# Altium PCB mtk_pcb.PcbDoc
Units mm, origin at the board's own origin, x right, y up, seen from the top; angles counter-clockwise.
Board outline 48 x 83 mm, 2 copper layers (Top Layer, Bottom Layer); 42 components, 45 nets, 167 pads, 17 vias.
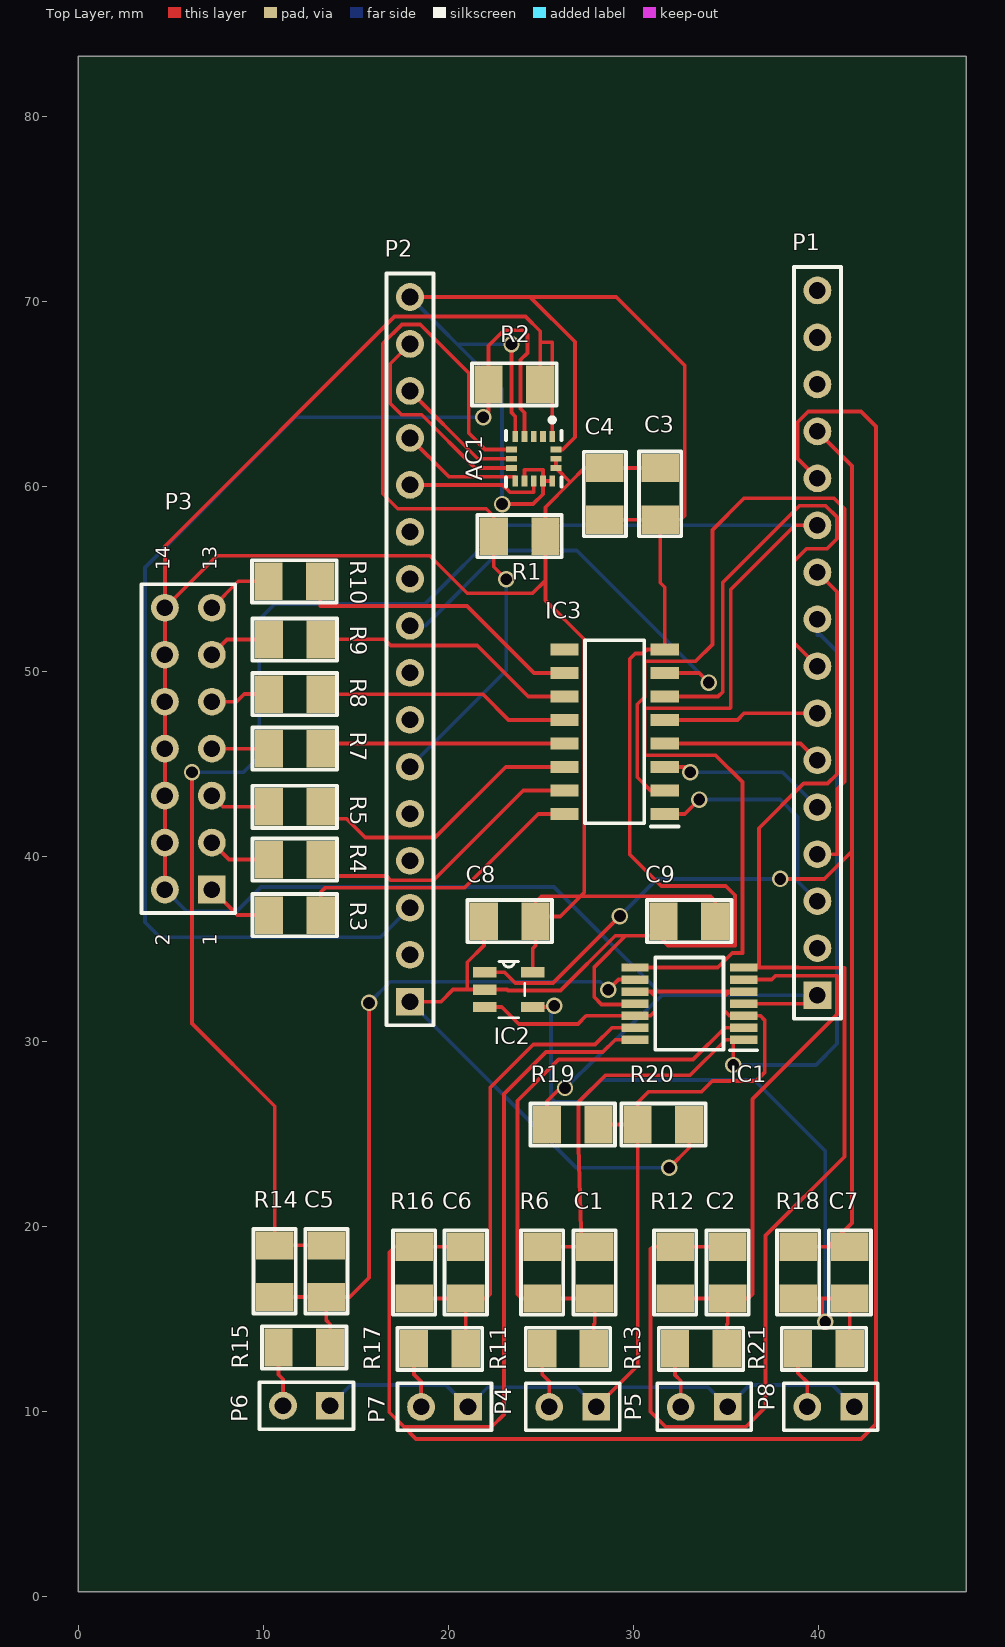
[diagram p0: Top Layer view]
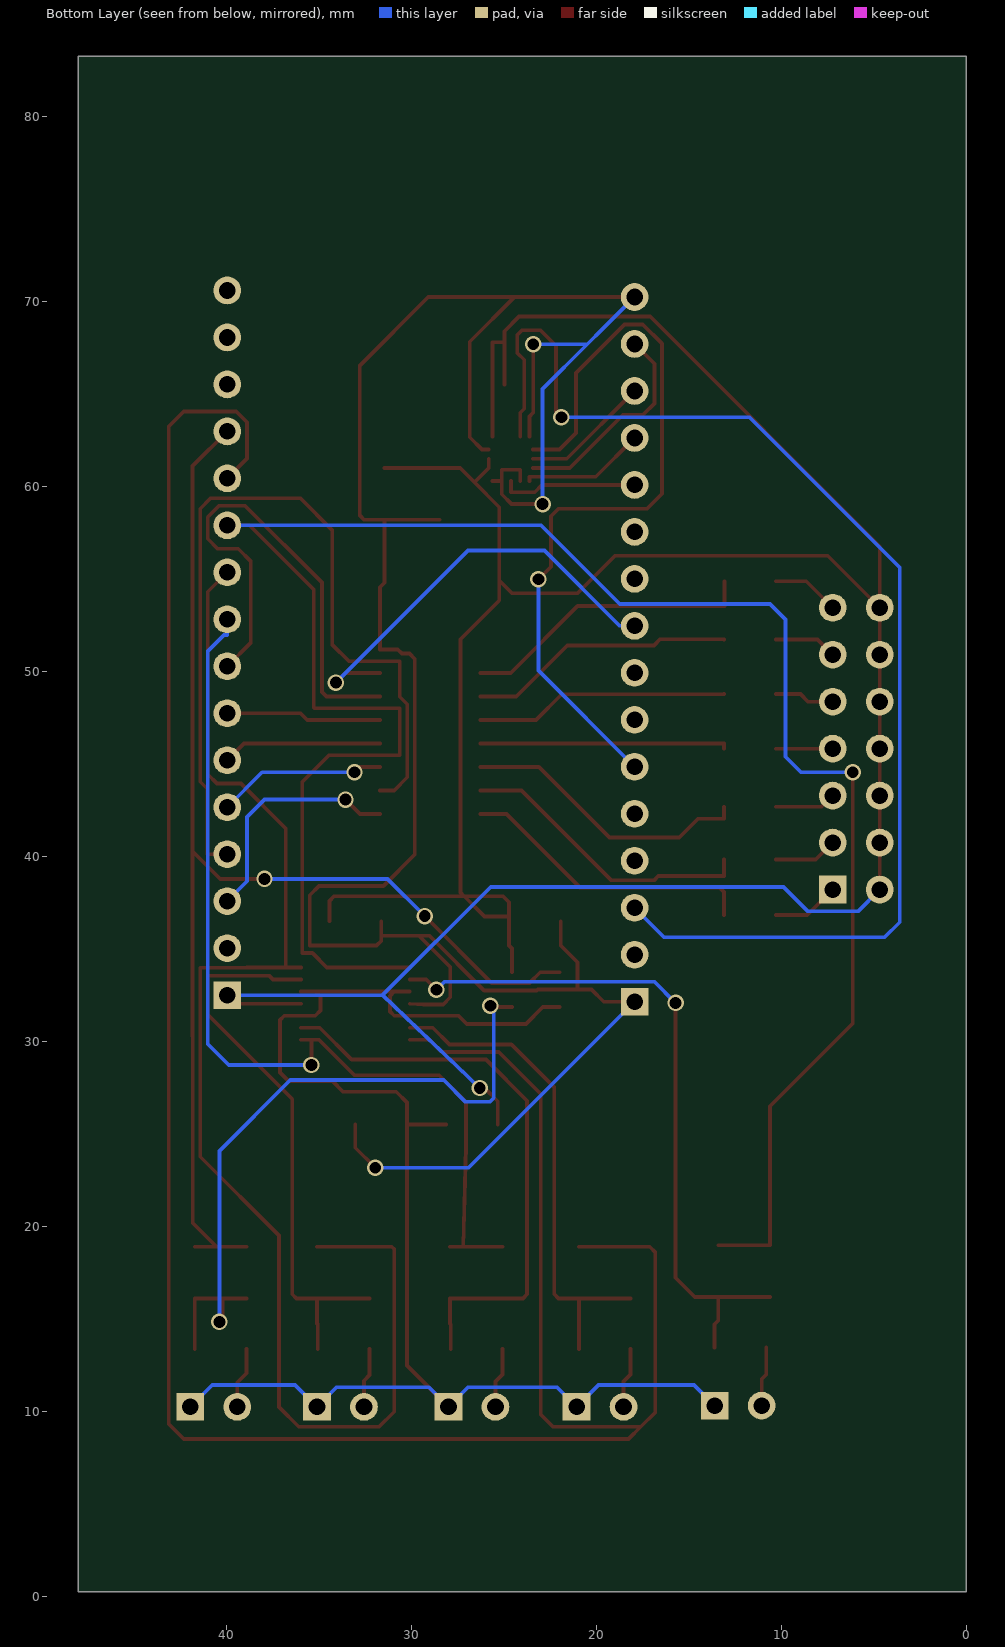
[diagram p1: Bottom Layer view, seen from below]
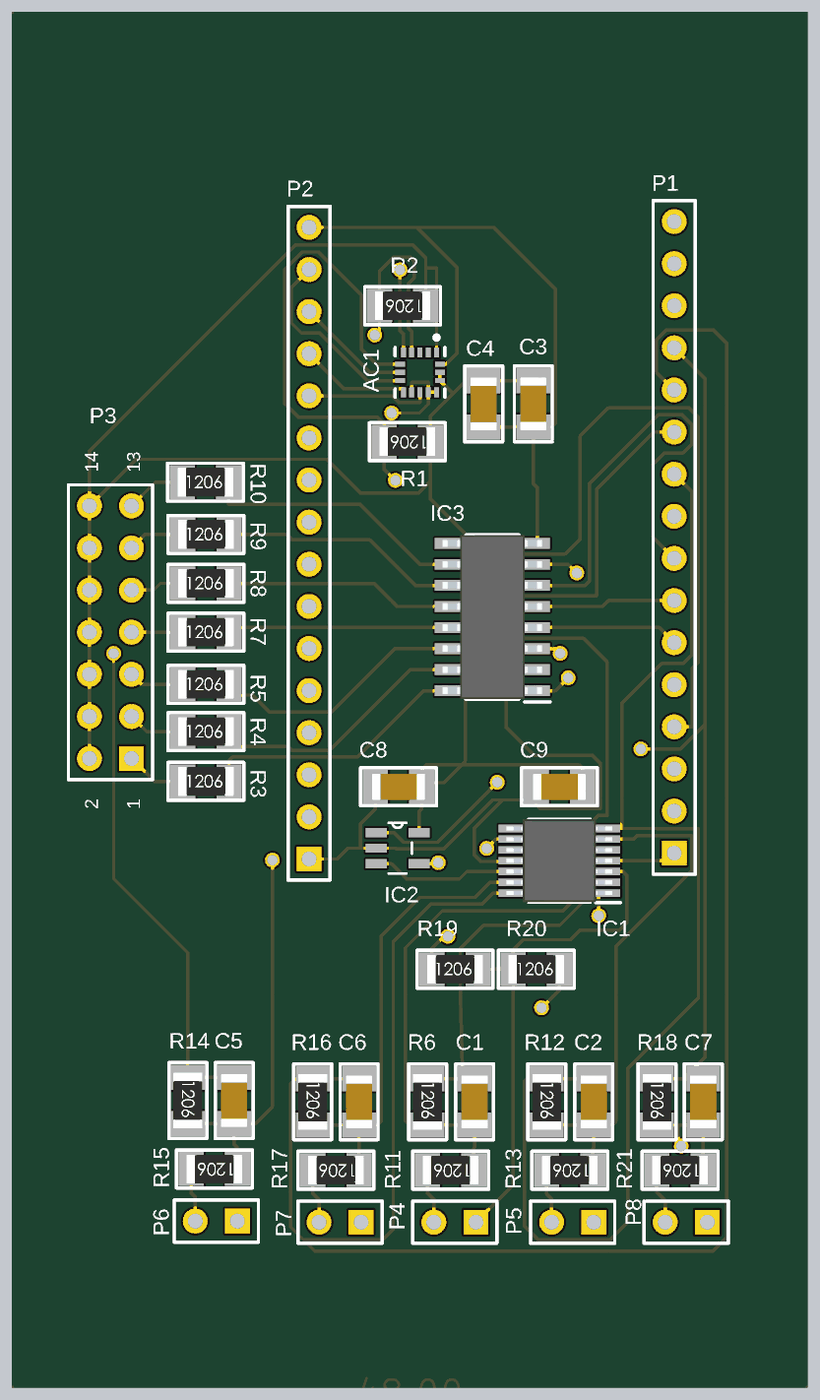
[diagram p2: 3D render of the assembled board from above, using the file's embedded part models]

## Layer stack, top to bottom
Top Solder: solder mask 0.0102, Solder Resist, Dk 3.5
Top Layer: signal copper 0.0356
Dielectric 1: dielectric 0.32, FR-4, Dk 4.8
Bottom Layer: signal copper 0.0356
Bottom Solder: solder mask 0.0102, Solder Resist, Dk 3.5

## Board outline
0,83.254 48,83.254 48,0.254 0,0.254

## Design rules (kind name [scope] priority, off if disabled: settings)
Clearance Clearance_Plane [InNetClass('All Nets') vs InNamedPolygon('Top_plane') + InNamedPolygon('Bottom_plane')] p1: gap=0.254 ignorepadtopadclearanceinfootprint=FALSE
Clearance Clearance_Board_Keepout [OnLayer('KeepOutLayer')] p2: gap=0.203 ignorepadtopadclearanceinfootprint=FALSE
Clearance Minimum_pad_component_clearcance [(InPadClass('All Pads') AND InComponentClass('All Components')) vs (InPadClass('All Pads') AND InComponentClass('All Components'))] p3: gap=0.178 ignorepadtopadclearanceinfootprint=FALSE
Clearance Clearance_DiffPairRouting [(IsTrack AND InDifferentialPairClass('All Differential Pairs')) vs (IsTrack AND InDifferentialPairClass('All Differential Pairs'))] p4: gap=0.203 ignorepadtopadclearanceinfootprint=FALSE
Clearance Clearance_Via_Pad [(IsVia) vs (IsPad)] p5: gap=0.254 ignorepadtopadclearanceinfootprint=FALSE
Clearance Clearance_Via_Via [(IsVia) vs (IsVia)] p6: gap=0.254 ignorepadtopadclearanceinfootprint=FALSE
Clearance Clearance_wara_Default [All] p7: gap=0.203 ignorepadtopadclearanceinfootprint=FALSE
ComponentClearance [All] p1: gap=0.203 collisioncheckmode=3 verticalgap=0.203 showdistances=FALSE
DiffPairsRouting [All] p1: maxlimit=0.254 minlimit=0.203 mostfreqgap=0.203 toplayer_minwidth=0.381 toplayer_maxwidth=0.381 toplayer_prefwidth=0.381 bottomlayer_minwidth=0.381 bottomlayer_maxwidth=0.381 bottomlayer_prefwidth=0.381 maxuncoupledlength=12.7
HoleSize [All] p1: absolutevalues=TRUE maxlimit=6.604 minlimit=0.508 maxpercent=80.000 minpercent=20.000
MinimumAnnularRing [All] p1: minimumring=0.203
MinimumSolderMaskSliver SilkscreenOverComponentPads [All] p2: minsoldermaskwidth=0.254
PlaneConnect [InNet('GND')] p1: planeconnectstyle=Relief reliefexpansion=0.508 reliefentries=4 reliefconductorwidth=0.254 reliefairgap=0.254
PolygonConnect [All] p1: connectstyle=Relief reliefconductorwidth=0.305 reliefentries=4 polygonreliefangle="90 Angle" airgapwidth=0.254
RoutingPriority RoutingPriority_Power [(InNet('VCC_GPS') AND InNet('VCC_GPS_ANT') AND InNet('VBAT') AND InNetClass('Power') AND InNetClass('signal'))] p1: routingpriority=100
RoutingPriority [All] p2 off: routingpriority=50
RoutingVias [All] p1: holewidth=0.635 width=0.889 viastyle="Through Hole" minholewidth=0.508 minwidth=0.762 maxholewidth=0.635 maxwidth=0.889
SolderMaskExpansion [All] p1: expansion=0.127
UnRoutedNet [All] p1: checkbadconnections=TRUE
Width Width_Diode [InNet('NetD4_1')] p1 off: maxlimit=1.27 minlimit=0.508 preferedwidth=0.508
Width Width_+24 [InNet('+24V_IN')] p2 off: maxlimit=1.27 minlimit=0.508 preferedwidth=0.508
Width Width_Power [InNet('VBAT')   + InNet('NetJ3_1')+ InNet('NetP3_2')] p3: maxlimit=0.762 minlimit=0.635 preferedwidth=0.635
Width Width_All [All] p4: maxlimit=0.635 minlimit=0.203 preferedwidth=0.203
24 further rules are at their usual default settings.

## Components (designator, comment, footprint, x,y, rotation, side; value= is the part's Value field where it differs from the comment)
AC1 "H3LIS331DLTR" PQFN50P300X300X100-16N 24.617,61.501 r270 top
C1 "0.033µF" SMD-1206C 27.911,17.501 r0 top value=0.033?F
C2 "0.033µF" SMD-1206C 35.101,17.501 r180 top value=0.033?F
C3 "100nF" SMD-1206C 31.455,59.604 r0 top value=0.10?F
C4 "10uF" SMD-1206C 28.459,59.598 r0 top value=0.10?F
C5 "0.033µF" SMD-1206C 13.405,17.576 r180 top value=0.033?F
C6 "0.033µF" SMD-1206C 20.941,17.501 r180 top value=0.033?F
C7 "0.033µF" SMD-1206C 41.705,17.501 r180 top value=0.033?F
C8 "0.01uF" SMD-1206C 23.323,36.501 r270 top value=0.10?F
C9 "0.01uF" SMD-1206C 33.029,36.501 r270 top value=0.10?F
IC1 "TLV2774AIPW" SOP65P640X120-14N 33.029,32.041 r180 top
IC2 "TLV2771CDBVR" SOT95P280X145-5N 23.266,32.801 r0 top
IC3 "ULN2003ADR2G" SOIC127P600X175-16N 28.987,46.744 r180 top
P1 "Header 16" HDR1X16 39.955,32.501 r90 top
P2 "Header 16" HDR1X16 17.927,32.147 r90 top
P3 "Header 7X2" HDR2X7 7.215,38.208 r90 top
P4 "Header 2" HDR1X2 27.992,10.24 r180 top
P5 "Header 2" HDR1X2 35.101,10.24 r180 top
P6 "Header 2" HDR1X2 13.6,10.307 r180 top
P7 "Header 2" HDR1X2 21.066,10.24 r180 top
P8 "Header 2" HDR1X2 41.951,10.24 r180 top
R1 "1k" SMD-1206-RES 23.852,57.318 r90 top
R2 "1k" SMD-1206-RES 23.57,65.521 r90 top
R3 "160" SMD-1206-RES 11.7,36.828 r270 top
R4 "160" SMD-1206-RES 11.7,39.828 r270 top
R5 "160" SMD-1206-RES 11.7,42.685 r270 top
R6 "1M" SMD-1206-RES 25.073,17.501 r180 top
R7 "160" SMD-1206-RES 11.7,45.828 r270 top
R8 "160" SMD-1206-RES 11.7,48.778 r270 top
R9 "160" SMD-1206-RES 11.7,51.728 r270 top
R10 "160" SMD-1206-RES 11.675,54.877 r270 top
R11 "100k" SMD-1206-RES 26.47,13.375 r90 top
R12 "1M" SMD-1206-RES 32.261,17.501 r180 top
R13 "100k" SMD-1206-RES 33.658,13.375 r90 top
R14 "1M" SMD-1206-RES 10.611,17.576 r180 top
R15 "100k" SMD-1206-RES 12.214,13.45 r90 top
R16 "1M" SMD-1206-RES 18.147,17.501 r180 top
R17 "100k" SMD-1206-RES 19.544,13.375 r90 top
R18 "1M" SMD-1206-RES 38.911,17.501 r180 top
R19 "100k" SMD-1206-RES 26.729,25.501 r270 top
R20 "100k" SMD-1206-RES 31.632,25.501 r270 top
R21 "100k" SMD-1206-RES 40.308,13.375 r90 top

## Footprints (in the part's own frame and the unit in brackets; to place one, negate y for a bottom-side part, rotate by r counter-clockwise, add the part's x,y. Pads: shape width x height; smd on the part's side, far side on the other; paste and mask are expansions set on the pad)
HDR1X2 [mm] "Connector; Header; 2 Position"
  rect 1.5x1.5 hole 0.9: 1(0,0)
  round 1.5 hole 0.9: 2(2.54,0)
  silkscreen extent -1.27,-1.27 3.81,1.27
HDR1X16 [mm] "Connector; Header; 16 Position"
  rect 1.5x1.5 hole 0.9: 1(0,0)
  round 1.5 hole 0.9: 2(2.54,0) 3(5.08,0) 4(7.62,0) 5(10.16,0) 6(12.7,0) 7(15.24,0) 8(17.78,0) 9(20.32,0) 10(22.86,0) 11(25.4,0) 12(27.94,0) 13(30.48,0) 14(33.02,0) 15(35.56,0) 16(38.1,0)
  silkscreen extent -1.27,-1.27 39.37,1.27
HDR2X7 [mm] "Connector; Header; 7x2 Position"
  rect 1.5x1.5 hole 0.9: 1(0,0)
  round 1.5 hole 0.9: 2(0,2.54) 3(2.54,0) 4(2.54,2.54) 5(5.08,0) 6(5.08,2.54) 7(7.62,0) 8(7.62,2.54) 9(10.16,0) 10(10.16,2.54) 11(12.7,0) 12(12.7,2.54) 13(15.24,0) 14(15.24,2.54)
  silkscreen extent -1.27,-1.27 16.51,3.81
PQFN50P300X300X100-16N [mm]
  rect 0.6x0.3 smd: 1(-1.2,1) 2(-1.2,0.5) 3(-1.2,0) 4(-1.2,-0.5) 5(-1.2,-1) 9(1.2,-1) 10(1.2,-0.5) 11(1.2,0) 12(1.2,0.5) 13(1.2,1)
  rect 0.3x0.6 smd: 6(-0.5,-1.2) 7(0,-1.2) 8(0.5,-1.2) 14(0.5,1.2) 15(0,1.2) 16(-0.5,1.2)
  silkscreen extent -2.22,-1.5 1.5,1.5
SMD-1206-RES [mil]
  rect 80x60 smd: 1(0,55) 2(0,-55)
  silkscreen extent -45,-90 45,90, body extent -34,-66 34,66, height 33
SMD-1206C [mil]
  rect 80x60 smd: 1(0,55) 2(0,-55)
  silkscreen extent -45,-90 45,90, body extent -31,-63 32,63, height 39
SOIC127P600X175-16N [mm]
  rect 1.525x0.65 smd: 1(-2.712,4.445) 2(-2.712,3.175) 3(-2.712,1.905) 4(-2.712,0.635) 5(-2.712,-0.635) 6(-2.712,-1.905) 7(-2.712,-3.175) 8(-2.712,-4.445) 9(2.712,-4.445) 10(2.712,-3.175) 11(2.712,-1.905) 12(2.712,-0.635) 13(2.712,0.635) 14(2.712,1.905) 15(2.712,3.175) 16(2.712,4.445)
  silkscreen extent -3.47,-4.95 1.6,5.12, body extent -3,-4.95 3,4.95, height 1.75
SOP65P640X120-14N [mm]
  rect 1.475x0.45 smd: 1(-2.938,1.95) 2(-2.938,1.3) 3(-2.938,0.65) 4(-2.938,0) 5(-2.938,-0.65) 6(-2.938,-1.3) 7(-2.938,-1.95) 8(2.938,-1.95) 9(2.938,-1.3) 10(2.938,-0.65) 11(2.938,0) 12(2.938,0.65) 13(2.938,1.3) 14(2.938,1.95)
  silkscreen extent -3.67,-2.5 1.85,2.52, body extent -3.2,-2.5 3.2,2.5, height 1.2
SOT95P280X145-5N [mil]
  rect 50x22 smd: 1(-51,37) 2(-51,0) 3(-51,-37) 4(51,-37) 5(51,37)
  silkscreen extent -21,-60 34,60

## Part data
AC1: "Accelerometer", Manufacturer_Name=STMicroelectronics, Mouser Part Number=511-H3LIS331DLTR, RS Part Number=1106549P, Datasheet Link=http://www.st.com/st-web-ui/static/active/en/resource/technical/document/datasheet/DM00053090.pdf, Height=1mm, Manufacturer_Part_Number=H3LIS331DLTR, Mouser Price/Stock=https://www.mouser.com/Search/Refine.aspx?Keyword=511-H3LIS331DLTR, RS Price/Stock=http://uk.rs-online.com/web/p/products/1106549P
C1 C2 C5 C6 C7: library part GC331AD72E333KX01D, "CAP CER 0.033UF 250V X7T 1206", Digi-Key Part Number=490-13989-1-ND, Manufacturer="Murata Electronics North America", Operating Temperature="-55?C ~ 125?C", Package / Case="1206 (3216 Metric)", Ratings=AEC-Q200, Temperature Coefficient=X7T, Tolerance=?10%, Voltage=250V, @ qty=0, Applications=Automotive, Datasheets=http://search.murata.co.jp/Ceramy/image/img/A01X/G101/ENG/GC331AD72E333KX01-01.pdf, Factory Stock=0, Features=-, Height - Seated (Max)=-, Image=//media.digikey.com/Renders/Murata%20Renders/1206(GC3)320x160.jpg, Lead Spacing=-, Lead Style=-, Minimum Quantity=1, Mounting Type="Surface Mount, MLCC", Packaging="Cut Tape (CT)", Part Number=GC331AD72E333KX01D, Part Status=Active, Quantity Available=3999, Series=GC3, Size / Dimension="0.126\" L x 0.063\" W (3.20mm x 1.60mm)", Thickness (Max)="0.039\" (1.00mm)", Unit Price (USD)=0.33
C3 C4 C8 C9: library part LLM315R71C104MA11L, "CAP CER 0.1UF 16V X7R 1206", Digi-Key Part Number=490-4495-1-ND, Manufacturer="Murata Electronics North America", Operating Temperature="-55?C ~ 125?C", Package / Case="1206 (3216 Metric)", Ratings=-, Temperature Coefficient=X7R, Tolerance=?20%, Voltage=16V, @ qty=0, Applications="Bypass, Decoupling", Datasheets=http://www.murata.com/~/media/webrenewal/support/library/catalog/products/capacitor/mlcc/c02e.pdf, Factory Stock=0, Features="Low ESL (Multi-Terminal)", Height - Seated (Max)=-, Image=//media.digikey.com/Renders/Murata%20Renders/1206(LLM315).jpg, Lead Spacing=-, Lead Style=-, Minimum Quantity=1, Mounting Type="Surface Mount, MLCC", Packaging="Cut Tape (CT)", Part Number=LLM315R71C104MA11L, Part Status=Active, Quantity Available=2915, Series=LLM, Size / Dimension="0.126\" L x 0.063\" W (3.20mm x 1.60mm)", Thickness (Max)="0.022\" (0.55mm)", Unit Price (USD)=0.9
IC1: "Integrated Circuit", Manufacturer_Name="Texas Instruments", RS Part Number=4625114, Datasheet Link=http://www.ti.com/lit/ds/symlink/tlv2774a.pdf, Height=1.2mm, Manufacturer_Part_Number=TLV2774AIPW, RS Price/Stock=https://uk.rs-online.com/web/p/products/4625114
IC2: "Integrated Circuit", Manufacturer_Name="Texas Instruments", Mouser Part Number=595-TLV2771CDBVR, Datasheet Link=http://www.ti.com/lit/gpn/tlv2771, Manufacturer_Part_Number=TLV2771CDBVR, Mouser Price/Stock=https://www.mouser.com/Search/Refine.aspx?Keyword=595-TLV2771CDBVR
IC3: "Integrated Circuit", Manufacturer_Name="ON Semiconductor", Mouser Part Number=863-ULN2003ADR2G, RS Part Number=1868994, Datasheet Link=http://www.onsemi.com/pub/Collateral/ULN2003A-D.PDF, Height=1.75mm, Manufacturer_Part_Number=ULN2003ADR2G, Mouser Price/Stock=https://www.mouser.com/Search/Refine.aspx?Keyword=863-ULN2003ADR2G, RS Price/Stock=http://uk.rs-online.com/web/p/products/1868994
P1 P2: "Header, 16-Pin", LatestRevisionDate=17-Jul-2002, LatestRevisionNote="Re-released for DXP Platform.", Publisher="Altium Limited"
P3: "Header, 7-Pin, Dual row", LatestRevisionDate=17-Jul-2002, LatestRevisionNote="Re-released for DXP Platform.", Publisher="Altium Limited"
P4 P5 P6 P7 P8: "Header, 2-Pin", LatestRevisionDate=17-Jul-2002, LatestRevisionNote="Re-released for DXP Platform.", Publisher="Altium Limited"
R1 R2: library part ERJ-8ENF1001V, "RES SMD 1K OHM 1% 1/4W 1206", Digi-Key Part Number=P1.00KFCT-ND, Manufacturer="Panasonic Electronic Components", Operating Temperature="-55?C ~ 155?C", Package / Case="1206 (3216 Metric)", Power (Watts)="0.25W, 1/4W", Supplier Device Package=1206, Temperature Coefficient=?100ppm/?C, Tolerance=?1%, @ qty=1500, Composition="Thick Film", Datasheets=http://industrial.panasonic.com/www-cgi/jvcr13pz.cgi?E+PZ+3+AOA0002+ERJ8ENF1001V+7+WW, Factory Stock=0, Failure Rate=-, Features="Automotive AEC-Q200", Height - Seated (Max)="0.028\" (0.70mm)", Image=//media.digikey.com/Renders/Panasonic%20Renders/ERJ-1206%20Pkg.jpg, Minimum Quantity=1, Number of Terminations=2, Packaging="Cut Tape (CT)", Part Number=ERJ-8ENF1001V, Part Status=Active, Quantity Available=607104, Series=ERJ, Size / Dimension="0.126\" L x 0.063\" W (3.20mm x 1.60mm)", Unit Price (USD)=0.00933
R3 R4 R5 R7 R8 R9 R10: library part ERJ-8ENF1600V, "RES SMD 160 OHM 1% 1/4W 1206", Digi-Key Part Number=P160FCT-ND, Manufacturer="Panasonic Electronic Components", Operating Temperature="-55?C ~ 155?C", Package / Case="1206 (3216 Metric)", Power (Watts)="0.25W, 1/4W", Supplier Device Package=1206, Temperature Coefficient=?100ppm/?C, Tolerance=?1%, @ qty=1500, Composition="Thick Film", Datasheets=http://industrial.panasonic.com/www-cgi/jvcr13pz.cgi?E+PZ+3+AOA0002+ERJ8ENF1600V+7+WW, Factory Stock=0, Failure Rate=-, Features="Automotive AEC-Q200", Height - Seated (Max)="0.028\" (0.70mm)", Image=//media.digikey.com/Renders/Panasonic%20Renders/ERJ-1206%20Pkg.jpg, Minimum Quantity=1, Number of Terminations=2, Packaging="Cut Tape (CT)", Part Number=ERJ-8ENF1600V, Part Status=Active, Quantity Available=54151, Series=ERJ, Size / Dimension="0.126\" L x 0.063\" W (3.20mm x 1.60mm)", Unit Price (USD)=0.00933
R6 R12 R14 R16 R18: library part ERJ-8ENF1004V, "RES SMD 1M OHM 1% 1/4W 1206", Digi-Key Part Number=P1.00MFCT-ND, Manufacturer="Panasonic Electronic Components", Operating Temperature="-55?C ~ 155?C", Package / Case="1206 (3216 Metric)", Power (Watts)="0.25W, 1/4W", Supplier Device Package=1206, Temperature Coefficient=?100ppm/?C, Tolerance=?1%, @ qty=1500, Composition="Thick Film", Datasheets=http://industrial.panasonic.com/www-cgi/jvcr13pz.cgi?E+PZ+3+AOA0002+ERJ8ENF1004V+7+WW, Factory Stock=0, Failure Rate=-, Features="Automotive AEC-Q200", Height - Seated (Max)="0.028\" (0.70mm)", Image=//media.digikey.com/Renders/Panasonic%20Renders/ERJ-1206%20Pkg.jpg, Minimum Quantity=1, Number of Terminations=2, Packaging="Cut Tape (CT)", Part Number=ERJ-8ENF1004V, Part Status=Active, Quantity Available=390460, Series=ERJ, Size / Dimension="0.126\" L x 0.063\" W (3.20mm x 1.60mm)", Unit Price (USD)=0.00933
R11 R13 R15 R17 R19 R20 R21: library part ERJ-8ENF1003V, "RES SMD 100K OHM 1% 1/4W 1206", Digi-Key Part Number=P100KFCT-ND, Manufacturer="Panasonic Electronic Components", Operating Temperature="-55?C ~ 155?C", Package / Case="1206 (3216 Metric)", Power (Watts)="0.25W, 1/4W", Supplier Device Package=1206, Temperature Coefficient=?100ppm/?C, Tolerance=?1%, @ qty=1500, Composition="Thick Film", Datasheets=http://industrial.panasonic.com/www-cgi/jvcr13pz.cgi?E+PZ+3+AOA0002+ERJ8ENF1003V+7+WW, Factory Stock=0, Failure Rate=-, Features="Automotive AEC-Q200", Height - Seated (Max)="0.028\" (0.70mm)", Image=//media.digikey.com/Renders/Panasonic%20Renders/ERJ-1206%20Pkg.jpg, Minimum Quantity=1, Number of Terminations=2, Packaging="Cut Tape (CT)", Part Number=ERJ-8ENF1003V, Part Status=Active, Quantity Available=576605, Series=ERJ, Size / Dimension="0.126\" L x 0.063\" W (3.20mm x 1.60mm)", Unit Price (USD)=0.00933

## Via types
v1: diameter 0.889, hole 0.635, Top Layer to Bottom Layer, 17 vias

## Nets (pads, with @x,y where several pads share a name; then routed paths per layer and width w, separated by ;. In a path a pad name is that pad's centre, name@x,y a point inside that pad or via, vN(x,y) a via of type N, cw(c..) or ccw(c..) an arc to the next point about the centre after c; other vN are vias at no path point)
1IN+: IC1.3 IC1.5 IC1.10 IC1.12 IC2.3 P4.1 P5.1 P6.1 P7.1 P8.1 R19.1 R20.2 | length 82.3
  Top Layer w0.203: IC2.3 22.891,31.861 23.805,30.948 27.006,30.948 27.45,31.391 IC1.12 30.93,31.391 31.158,31.62 31.158,32.463 30.93,32.691 ; P4.1 30.235,12.484 R20.2 ; R19.1 R20.2 ; IC1.10 30.93,32.691 ; IC1.5 35.197,32.691 ; R20.2 30.235,26.693 30.82,27.277 33.693,27.277 34.27,27.855 36.638,27.855 37.102,28.319 37.102,31.164 36.874,31.391 IC1.3 35.197,31.391 34.917,31.671 34.917,32.412 35.197,32.691 ; 30.93,32.691 35.197,32.691
  Bottom Layer w0.203: P6.1 14.721,11.428 19.879,11.428 P7.1 22.127,11.301 26.932,11.301 P4.1 29.053,11.301 34.04,11.301 P5.1 36.288,11.428 40.763,11.428 P8.1
1IN-: C1.2 IC1.2 R6.1 R11.2 | length 31.3
  Top Layer w0.203: R11.2 27.867,14.704 27.911,14.749 C1.2 R6.1 23.967,16.104 23.741,16.33 23.741,26.795 25.964,29.017 33.228,29.017 34.952,30.741 IC1.2
2IN-: C2.1 IC1.6 R12.1 R13.2 | length 31.3
  Top Layer w0.203: R12.1 C2.1 ; R13.2 35.055,14.704 35.101,14.75 C2.1 ; IC1.6 37.483,33.341 37.698,33.556 41.01,33.556 41.01,31.446 36.441,26.878 36.441,16.33 36.215,16.104 C2.1
3IN-: C5.1 IC1.9 R14.1 R15.2 | length 38.5
  Top Layer w0.203: R14.1 C5.1 ; R15.2 13.611,14.704 13.405,14.911 C5.1 ; v1(15.715,32.078) 15.715,17.221 14.674,16.179 C5.1 ; v1(28.644,32.789) 29.196,33.341 IC1.9
  Bottom Layer w0.203: v1(15.715,32.078) 16.858,33.221 28.212,33.221 v1(28.644,32.789)
3V3: AC1.1 AC1.14 AC1.15 C3.1 C4.1 C8.1 C9.1 IC1.4 IC2.5 P1.1 P3.2 P3.4 P3.6 P3.8 P3.10 P3.12 P3.14 R1.2 R2.2 R19.2 | length 177.2
  Top Layer w0.203: P3.2 P3.4 P3.6 P3.8 P3.10 P3.12 P3.14 ; IC2.5 24.562,35.024 24.72,35.182 C8.1 C8.1@24.72,36.752 ; R2.2 24.967,67.795 ; R19.2 25.332,26.76 26.053,27.481 v1(26.307,27.481) ; AC1.1 25.617,67.795 24.967,67.795 ; AC1.15 AC1.14 26.591,60.226 ; C3.1 29.945,61.001 29.939,60.995 C4.1 27.36,60.995 26.591,60.226 ; C9.1 34.426,37.598 34.181,37.844 27.145,37.844 ; IC1.4 39.307,32.041 39.307,32.501 P1.1 ; P3.14 4.675,56.776 17.087,69.187 24.173,69.187 24.967,68.394 24.967,67.795 ; P3.14 7.485,56.259 18.992,56.259 21.024,54.227 24.554,54.227 25.249,54.922 ; C8.1@24.72,36.752 26.053,36.752 27.145,37.844 ; C8.1@24.72,36.752 24.72,37.527 25.037,37.844 27.145,37.844 ; 25.249,54.922 R1.2 25.249,58.884 26.591,60.226 ; 25.249,54.922 25.249,53.846 27.348,51.747 27.348,38.047 27.145,37.844
  Bottom Layer w0.203: P3.2 5.852,37.031 8.552,37.031 9.873,38.352 25.711,38.352 31.562,32.501 ; v1(26.307,27.481) 31.562,32.501 ; P1.1 31.562,32.501
4IN-: C6.1 IC1.13 R16.1 R17.2 | length 27.3
  Top Layer w0.203: R16.1 C6.1 ; R17.2 C6.1 ; IC1.13 28.847,30.741 27.936,29.83 24.592,29.83 22.268,27.506 22.268,16.33 22.042,16.104 C6.1
5IN-: C7.1 IC2.4 R18.1 R21.2 | length 39.4
  Top Layer w0.203: IC2.4 25.658,31.861 v1(25.723,31.926) ; R18.1 40.201,16.104 ; v1(40.378,14.831) 40.201,15.009 40.201,16.104 ; R21.2 C7.1 40.201,16.104
  Bottom Layer w0.203: v1(25.723,31.926) 25.545,31.748 25.545,26.947 25.761,26.731 27.069,26.731 28.25,27.912 36.543,27.912 40.378,24.077 v1(40.378,14.831)
A1/IO26: C1.1 IC1.1 P1.9 R6.2 | length 51.9
  Top Layer w0.203: R6.2 C1.1@27.196,18.898 ; C1.1 C1.1@27.196,18.898 ; v1(35.4,28.725) IC1.1@35.4,30.091 ; IC1.1 IC1.1@35.4,30.091 ; C1.1@27.196,18.898 27.043,24.331 27.043,26.719 28.491,28.166 33.069,28.166 34.994,30.091 IC1.1@35.4,30.091
  Bottom Layer w0.203: v1(35.4,28.725) 39.87,28.725 41.013,29.868 41.013,51.077 40.124,51.966 39.955,51.966 P1.9
A2/IO27: C2.2 IC1.7 P1.10 R12.2 | length 75.3
  Top Layer w0.203: C2.2 R12.2 31.057,18.898 30.93,18.771 30.93,9.98 31.742,9.167 36.086,9.167 37.153,10.234 37.153,19.505 41.416,23.769 41.416,33.983 38.913,33.983 38.905,33.991 36.797,33.991 ; IC1.7 36.797,33.991 ; P1.10 41.01,54.306 41.01,44.444 40.505,43.94 39.21,43.94 36.797,41.527 36.797,33.991
A3/IO14: C5.2 IC1.8 P1.11 R14.2 | length 114.9
  Top Layer w0.203: v1(6.139,44.549) 6.139,30.96 10.61,26.49 10.61,18.973 R14.2 C5.2 ; IC1.8 34.57,33.991 35.353,34.774 35.9,34.774 35.9,44.024 34.45,45.474 30.625,45.474 30.625,48.009 35.241,48.009 35.273,48.041 35.273,54.43 38.744,57.901 P1.11
  Bottom Layer w0.203: v1(6.139,44.549) 8.933,44.549 9.771,45.388 9.771,52.804 10.61,53.643 18.738,53.643 22.996,57.901 P1.11
A4/IO12: C6.2 IC1.14 P1.12 R16.2 | length 133.7
  Top Layer w0.203: C6.2 R16.2 17.112,18.898 16.807,18.593 16.807,9.955 17.595,9.167 ; IC1.14 29.019,30.091 28.351,29.424 25.278,29.424 23.005,27.15 23.005,9.828 22.344,9.167 17.595,9.167 ; P1.12 38.88,61.516 38.88,63.472 39.464,64.057 42.309,64.057 43.122,63.244 43.122,9.32 42.309,8.507 18.255,8.507 17.595,9.167
A5/IO13: C7.2 IC2.1 P1.13 R18.2 | length 71.2
  Top Layer w0.203: IC2.1 23.03,33.741 23.614,33.157 25.658,33.157 v1(29.279,36.777) ; v1(37.94,38.784) 40.328,38.784 41.826,40.282 ; R18.2 40.533,18.898 ; P1.13 41.826,61.11 41.826,40.282 ; C7.2 40.533,18.898 ; 40.533,18.898 41.823,20.187 41.826,40.282
  Bottom Layer w0.203: v1(29.279,36.777) 31.285,38.784 v1(37.94,38.784)
GND: AC1.5 AC1.10 AC1.12 AC1.13 AC1.16 C3.2 C4.2 C8.2 C9.2 IC1.11 IC2.2 IC3.8 P2.1 P2.16 R20.1 | length 146.3
  Top Layer w0.203: P2.1 19.601,32.147 20.255,32.801 21.024,32.801 ; P2.16 24.423,70.247 ; C8.2 21.926,35.177 21.024,34.275 21.024,32.801 ; v1(22.903,59.053) 24.583,59.053 25.117,59.586 AC1.12 ; v1(23.414,67.689) 23.414,63.997 23.617,63.794 AC1.5 ; AC1.10 24.117,60.907 25.117,60.907 AC1.12 ; AC1.13 AC1.12 ; AC1.16 26.188,62.001 26.846,62.66 26.846,67.823 24.423,70.247 ; C4.2 29.939,58.201 29.945,58.207 C3.2 ; IC1.11 29.35,31.998 28.279,31.998 27.894,32.383 27.894,34.021 29.583,35.71 ; C9.2 C9.2@31.632,35.71 ; v1(31.95,23.175) 33.029,24.255 R20.1 ; 21.024,32.801 IC2.2 23.165,32.801 23.216,32.75 26.065,32.75 29.025,35.71 29.583,35.71 ; 24.423,70.247 29.082,70.247 32.784,66.546 32.784,58.436 32.555,58.207 C3.2 ; 29.583,35.71 C9.2@31.632,35.71 ; C3.2 31.455,54.801 31.699,54.557 IC3.8 30.737,51.189 30.513,50.965 30.107,50.965 29.812,50.671 29.812,40.104 31.514,38.403 34.994,38.403 35.493,37.903 35.493,35.18 31.883,35.18 31.632,35.431 C9.2@31.632,35.71
  Bottom Layer w0.203: P2.1 26.899,23.175 v1(31.95,23.175) ; P2.16 19.637,68.537 20.486,67.689 ; v1(22.903,59.053) 22.903,65.271 20.486,67.689 ; v1(23.414,67.689) 20.486,67.689
IO0/INT2: AC1.9 P2.13 | length 6.8
  Top Layer w0.203: P2.13 20.028,60.526 23.617,60.526 AC1.9
IO2/SA0: AC1.7 P2.14 | length 7
  Top Layer w0.203: P2.14 21.593,61.501 AC1.7
IO4/INT1: AC1.11 P2.12 | length 7.5
  Top Layer w0.203: P2.12 22.929,60.087 23.328,59.688 24.617,59.688 AC1.11
IO5/LED7: IC3.7 P2.9 | length 23.4
  Top Layer w0.203: IC3.7 33.561,49.919 v1(34.079,49.401)
  Bottom Layer w0.203: P2.9 18.73,52.467 22.802,56.538 26.942,56.538 v1(34.079,49.401)
IO15/CS: AC1.8 P2.15 | length 11.7
  Top Layer w0.203: P2.15 16.858,66.638 16.858,64.488 17.468,63.879 18.56,63.879 21.438,61.001 AC1.8
IO21/SDA: AC1.6 P2.6 R1.1 | length 42.7
  Top Layer w0.203: v1(23.132,54.989) 22.455,55.666 R1.1 22.455,58.392 22.049,58.799 17.264,58.799 16.452,59.612 16.452,67.725 17.488,68.762 18.477,68.762 21.1,66.139 21.1,62.888 21.987,62.001 AC1.6
  Bottom Layer w0.203: P2.6 23.132,50.052 v1(23.132,54.989)
IO22/SCL: AC1.4 P2.3 R2.1 | length 68.4
  Top Layer w0.203: v1(21.887,63.752) 22.173,64.038 R2.1 22.173,67.613 23.011,68.451 24.021,68.451 24.275,68.197 24.275,67.225 23.9,66.851 23.9,64.209 24.117,63.992 AC1.4
  Bottom Layer w0.203: P2.3 16.334,35.634 4.412,35.634 3.599,36.447 3.599,55.624 11.727,63.752 v1(21.887,63.752)
IO25/LED6: IC3.6 P1.8 | length 27.5
  Top Layer w0.203: IC3.6 34.587,48.649 34.834,48.897 34.834,54.804 38.986,58.956 40.399,58.956 41.01,58.345 41.01,57.173 40.476,56.64 39.362,56.64 38.677,55.954 38.677,51.56 P1.8
IO32/LED4: IC3.4 P1.6 | length 8.6
  Top Layer w0.203: IC3.4 39.047,46.109 P1.6
IO33/LED5: IC3.5 P1.7 | length 8.4
  Top Layer w0.203: IC3.5 35.629,47.379 35.99,47.741 P1.7
IO34/LED3: IC3.3 P1.5 | length 9.2
  Top Layer w0.203: IC3.3 32.784,44.839 v1(33.074,44.549)
  Bottom Layer w0.203: v1(33.074,44.549) 38.067,44.549 P1.5
IO36/LED1: IC3.1 P1.3 | length 12.9
  Top Layer w0.203: IC3.1 32.784,42.299 v1(33.561,43.076)
  Bottom Layer w0.203: v1(33.561,43.076) 37.94,43.076 38.88,42.136 38.88,38.656 P1.3
IO39/LED2: IC3.2 P1.4 | length 46.4
  Top Layer w0.203: IC3.2 30.93,43.569 30.218,44.28 30.218,48.232 30.625,48.639 30.625,50.549 33.368,50.549 34.282,51.463 34.282,57.656 35.989,59.362 40.853,59.362 41.416,58.799 41.416,44.041 41.039,43.664 41.039,40.121 P1.4
NetIC3_10: IC3.10 R10.1 | length 16
  Top Layer w0.203: R10.1 13.072,53.541 21.009,53.541 24.63,49.919 IC3.10
NetIC3_11: IC3.11 R9.1 | length 14.5
  Top Layer w0.203: R9.1 13.097,51.738 16.553,51.738 16.883,51.407 21.567,51.407 24.326,48.649 IC3.11
NetIC3_12: IC3.12 R8.1 | length 13.8
  Top Layer w0.203: R8.1 13.097,48.766 21.872,48.766 23.259,47.379 IC3.12
NetIC3_13: IC3.13 R7.1 | length 13.5
  Top Layer w0.203: R7.1 13.097,46.109 IC3.13
NetIC3_14: IC3.14 R5.1 | length 15.8
  Top Layer w0.203: R5.1 13.097,42.035 14.496,42.035 15.512,41.019 19.286,41.019 23.106,44.839 IC3.14
NetIC3_15: IC3.15 R4.1 | length 16.2
  Top Layer w0.203: R4.1 13.097,38.936 16.655,38.936 16.883,38.707 19.184,38.707 24.046,43.569 IC3.15
NetIC3_16: IC3.16 R3.1 | length 16.2
  Top Layer w0.203: R3.1 13.097,38.072 13.326,38.301 20.861,38.301 24.859,42.299 IC3.16
NetP3_1: P3.1 R3.2 | length 3.7
  Top Layer w0.203: P3.1 8.595,36.828 R3.2
NetP3_3: P3.3 R4.2 | length 3.5
  Top Layer w0.203: P3.3 8.135,39.828 R4.2
NetP3_5: P3.5 R5.2 | length 3.3
  Top Layer w0.203: P3.5 7.818,42.685 R5.2
NetP3_7: P3.7 R7.2 | length 3.1
  Top Layer w0.203: P3.7 R7.2
NetP3_9: P3.9 R8.2 | length 3.3
  Top Layer w0.203: P3.9 8.552,48.368 8.962,48.778 R8.2
NetP3_11: P3.11 R9.2 | length 3.4
  Top Layer w0.203: P3.11 8.035,51.728 R9.2
NetP3_13: P3.13 R10.2 | length 3.7
  Top Layer w0.203: P3.13 8.644,54.877 R10.2
NetP4_2: P4.2 R11.1 | length 3.3
  Top Layer w0.203: R11.1 25.073,11.985 25.452,11.606 P4.2
NetP5_2: P5.2 R13.1 | length 3.3
  Top Layer w0.203: R13.1 32.261,11.956 32.561,11.656 P5.2
NetP6_2: P6.2 R15.1 | length 3.2
  Top Layer w0.203: R15.1 10.817,11.976 11.06,11.733 P6.2
NetP7_2: P7.2 R17.1 | length 3.3
  Top Layer w0.203: R17.1 18.147,11.985 18.526,11.606 P7.2
NetP8_2: P8.2 R21.1 | length 3.3
  Top Layer w0.203: R21.1 38.911,12.055 39.411,11.555 P8.2
pads on no net: AC1.2 AC1.3 IC3.9 P1.2 P1.14 P1.15 P1.16 P2.2 P2.4 P2.5 P2.7 P2.8 P2.10 P2.11

## Dimensions
0,0.254 to 48,0.254 on Top Layer
0,83.254 to 0,0.254 on Top Layer

## Text inside footprints (layer, text, board x,y; h text height)
P3: Top Overlay "2" at 5.183,35.16 h1.27 r90; Top Overlay "1" at 7.723,35.16 h1.27 r90; Top Overlay "14" at 5.183,55.48 h1.27 r90; Top Overlay "13" at 7.723,55.48 h1.27 r90